# EAGLE board JM Logics I2C SMD Adapter v1.4 (EAGLE 6.5.0)
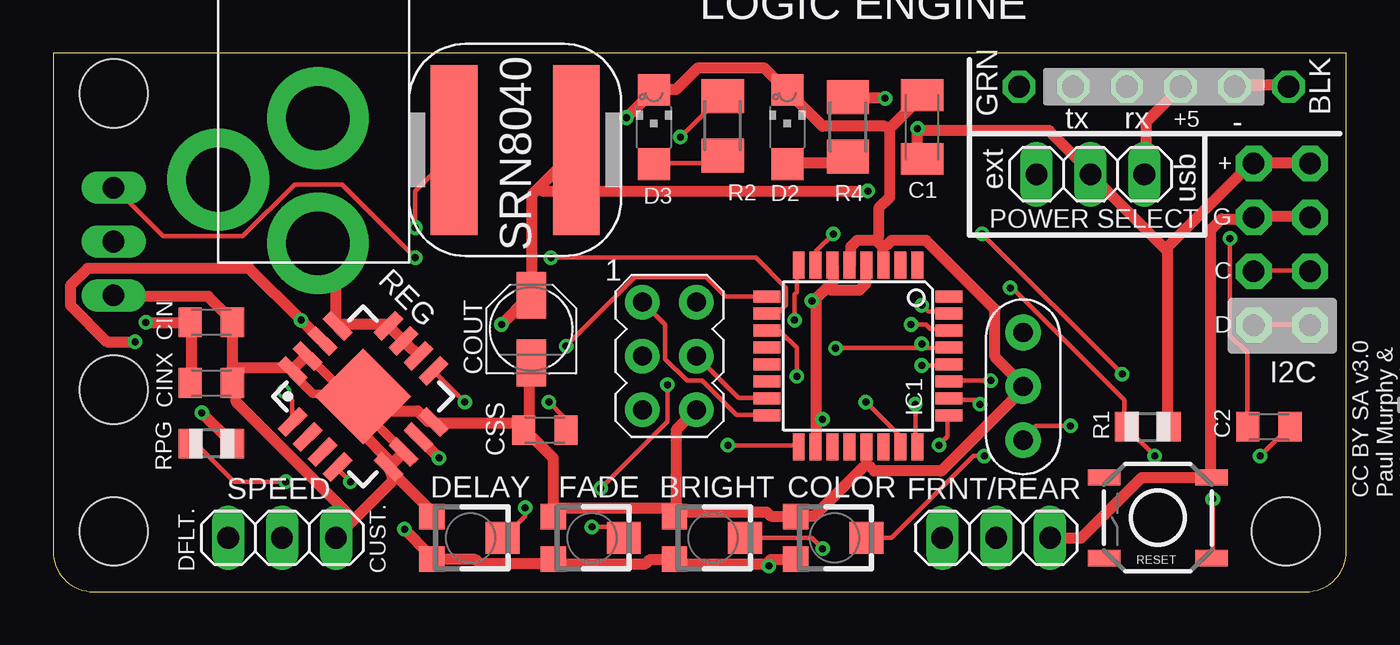
[diagram p0: board, top side]
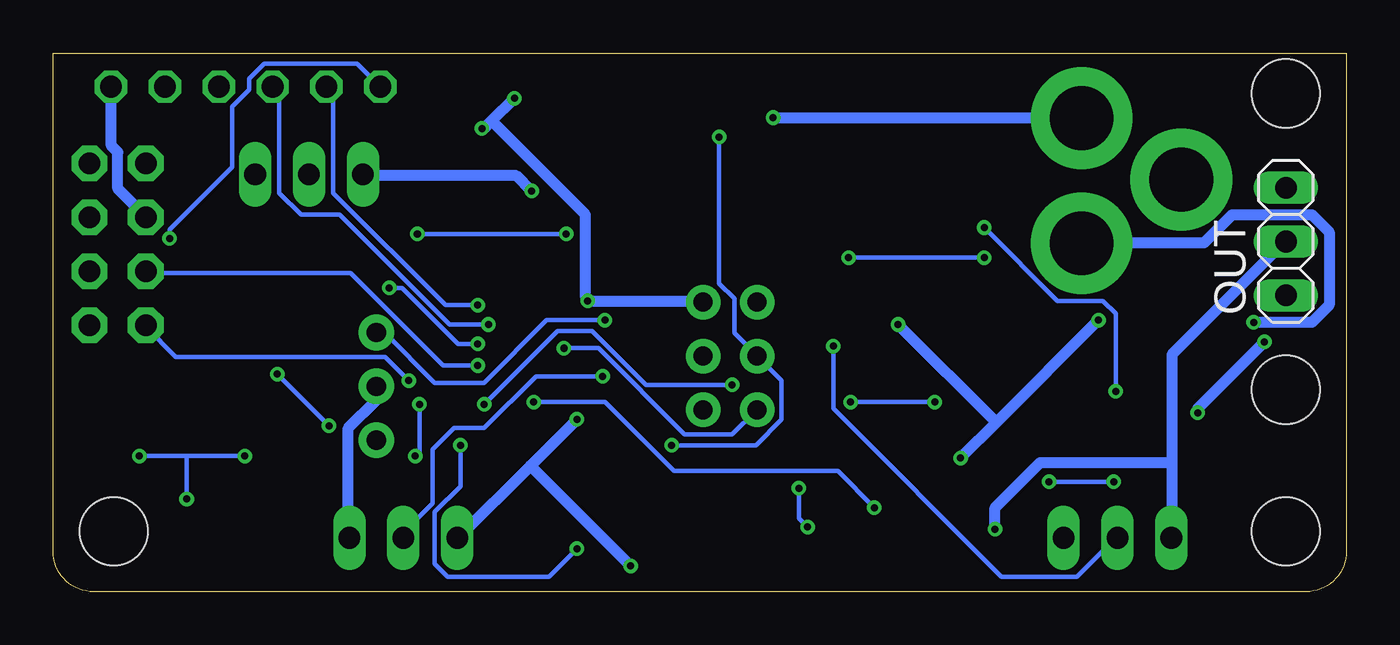
[diagram p1: board, bottom side, seen from below]

Size 60.96 x 25.4 mm. Coordinates in mm from the lower left corner, seen from the top.
Outline: 0,25.4 0,1.91 arc90 1.91,0 59.05,0 arc90 60.96,1.91 60.96,25.4 0,25.4
Copper layers (1*16): Top 0.0356mm / dielectric 1.5011mm / Bottom 0.0356mm
Design rules "LaenPCBOrder *": minimum track width 8mil, minimum drill 13mil, track to track 6mil, track to pad 6mil, pad to pad 6mil, via to via 12mil, smd to smd 6mil, copper to edge 15mil, drill to drill 6mil, minimum pad ring 7mil, minimum via ring 7mil, stop-mask expansion 4mil, vias tented up to drill 14mil, thermal gap 10mil
Net classes: 1 supply: width 0.508 mm, drill 0.152 mm, clearance 0.203 mm
Holes 3.2 mm at 58.1,2.86 2.86,2.86 2.86,30.16 2.86,9.53 2.86,23.5

## Footprints (pad centres in the part's own frame; a part is rotated, then mirrored left to right if it is on the bottom)
TC33X = smd 1.2 x 1.2: 1 -1,-1.825; 3 1,-1.825 | smd 1.5 x 1.6: 2 0,1.5
C1206K = smd 1.5 x 2: 1 -1.5,0; 2 1.5,0
C0805K = smd 1.1 x 1.4: 1 -1,0; 2 1,0
CASE_B = smd 2.2 x 1.4: + 1.6,0; - -1.6,0
CHIPLED_1206 = smd 1.5 x 1.5: A 0,-1.75; C 0,1.75
1X03 = drill 1.016 long: 1 -2.54,0; 2 0,0; 3 2.54,0
1X04-CB = drill 1.016 pad 1.676 octagon: 1 -3.81,0; 2 -1.27,0; 3 1.27,0; 4 3.81,0
TQFP32-08 = smd 1.27 x 0.559: 1 -4.293,2.8; 2 -4.293,2; 3 -4.293,1.2; 4 -4.293,0.4; 5 -4.293,-0.4; 6 -4.293,-1.2; 7 -4.293,-2; 8 -4.293,-2.8; 17 4.293,-2.8; 18 4.293,-2; 19 4.293,-1.2; 20 4.293,-0.4; 21 4.293,0.4; 22 4.293,1.2; 23 4.293,2; 24 4.293,2.8 | smd 0.559 x 1.27: 9 -2.8,-4.293; 10 -2,-4.293; 11 -1.2,-4.293; 12 -0.4,-4.293; 13 0.4,-4.293; 14 1.2,-4.293; 15 2,-4.293; 16 2.8,-4.293; 25 2.8,4.293; 26 2,4.293; 27 1.2,4.293; 28 0.4,4.293; 29 -0.4,4.293; 30 -1.2,4.293; 31 -2,4.293; 32 -2.8,4.293
AVRISP = drill 0.9 pad 1.626: 1 -1.27,2.54; 2 1.27,2.54; 3 -1.27,0; 4 1.27,0; 5 -1.27,-2.54; 6 1.27,-2.54
SRN8040 = smd 2.2 x 8: P$1 1.125,4; P$2 6.875,4
PJ-102A = drill 3 pad 4.8: RING 0.1,-3.39; RING_SW -4.6,-6.29; TIP 0.1,-9.29
1X06-CLEAN = drill 1.016 octagon: 1 -6.35,0; 2 -3.81,0; 3 -1.27,0; 4 1.27,0; 5 3.81,0; 6 6.35,0
R0805 = smd 1.1 x 1.4: 1 -1,0; 2 1,0
M1206 = smd 1.6 x 2: 1 -1.4,0; 2 1.4,0
TPS6213X = smd 1.45 x 0.55: 1 -3.2,1.5; 2 -3.2,0.5; 3 -3.2,-0.5; 4 -3.2,-1.5; 9 3.2,-1.5; 10 3.2,-0.5; 11 3.2,0.5; 12 3.2,1.5 | smd 0.55 x 1.45: 5 -1.5,-3.2; 6 -0.5,-3.2; 7 0.5,-3.2; 8 1.5,-3.2; 13 1.5,3.2; 14 0.5,3.2; 15 -0.5,3.2; 16 -1.5,3.2 | smd 3.2 x 3.2: 17-THERMALPAD 0,0
TACTILE_SWITCH_SMD = smd 1.524 x 0.762: 1 -2.54,1.905; 2 2.54,1.905; 3 -2.54,-1.905; 4 2.54,-1.905
CERM_OSC = drill 0.9 pad 1.676: P$1 -2.54,0; P$2 0,0; P$3 2.54,0

## Placement (x,y rotation side)
BRIGHT  [TC33X]  31.11,2.54 270 top
C1  0.1uF  [C1206K]  40.96,21.91 90 top
C2  0.1uF  [C0805K]  57.31,7.78 0 top
CIN  10uF  [C0805K]  7.46,12.7 0 top
CINX  100nF  [C0805K]  7.46,9.84 0 top
COLOR  [TC33X]  36.83,2.54 270 top
COUT  22uF  [CASE_B]  22.54,12.38 90 top
CSS  3.3nF  [C0805K]  23.18,7.62 180 top
D2  [CHIPLED_1206]  34.61,21.91 0 top
D3  Green  [CHIPLED_1206]  28.32,21.91 0 top
DELAY  [TC33X]  19.68,2.54 270 top
FADE  [TC33X]  25.4,2.54 270 top
FRNT/REAR  [1X03]  44.45,2.54 0 top
I2C  [1X04-CB]  56.59,16.38 90 top
I2C1  [1X04-CB]  59.25,16.38 90 top
IC1  MEGA328P  [TQFP32-08]  37.94,11.11 270 top
ICSP  AVRISP-6  [AVRISP]  29.05,11.11 0 top
INDUCTOR  SRN8040-2R2Y  [SRN8040]  17.78,16.83 0 top
J2  2.1MMJACK  [PJ-102A]  12.38,25.72 0 top
JP7  [1X06-CLEAN]  51.88,23.81 180 top
OUT  [1X03]  2.86,16.51 270 bottom
PWR_SEL1  [1X03]  48.9,19.68 0 top
R1  10k  [R0805]  51.59,7.78 0 top
R3  1.0 K  [M1206]  31.56,21.97 270 top
R4  1.0 K  [M1206]  37.47,21.91 270 top
REG  TPS62133  [TPS6213X]  14.61,9.21 45 top
RESET  [TACTILE_SWITCH_SMD]  52.07,3.49 180 top
RPG  100k  [R0805]  7.46,6.99 180 top
SPEED  [1X03]  10.79,2.54 0 top
U$1  ROYAL-ENGINEERS-OF-NABOOSMALL  [ROYAL-ENGINEERS-OF-NABOO-SMALL]  73.5,15.24 0 bottom  (outside the outline)
U$2  RSERIES-OSHW-LOGOMEDIUM  [RSERIES-OSHW-LOGO-MEDIUM]  65.79,8.86 0 top  (outside the outline)
X1  16MHz  [CERM_OSC]  45.72,9.68 90 top

## Library data of the parts
BRIGHT C2 CIN CINX COLOR CSS DELAY FADE ICSP R1 RPG = adafruit
C1 D2 D3 J2 R3 R4 = minimidi
COUT = dp_devices
FRNT/REAR OUT PWR_SEL1 SPEED = pinhead
I2C I2C1 JP7 = carduino
IC1 = avr-7
INDUCTOR REG = joymonkey
RESET = SparkFun-Electromechanical
U$1 U$2 = rseries
X1 = digg

## Nets
+5V [supply]: BRIGHT.3 C1.1 COLOR.3 DELAY.3 FADE.3 FRNT/REAR.1 I2C1.4 I2C.4 IC1.4 IC1.6 IC1.18 ICSP.2 OUT.2 PWR_SEL1.2 R1.2 R4.1 SPEED.1
ANALOG0: DELAY.2 IC1.23
ANALOG1: FADE.2 IC1.24
ANALOG2: BRIGHT.2 IC1.25
ANALOG3: COLOR.2 IC1.26
ANALOG4: I2C1.1 I2C.1 IC1.27
ANALOG5: I2C1.2 I2C.2 IC1.28
AREF: IC1.20
DIGITAL2: IC1.32
DIGITAL3: IC1.1
DIGITAL4: IC1.2
DIGITAL5: IC1.9 SPEED.2
DIGITAL6: IC1.10 OUT.1
DIGITAL7: FRNT/REAR.2 IC1.11
DIGITAL8: IC1.12
DIGITAL9: IC1.13
DIGITAL10: IC1.14
GND [supply]: BRIGHT.1 C1.2 CIN.2 CINX.2 COLOR.1 COUT.- CSS.2 D2.C D3.C DELAY.1 FADE.1 FRNT/REAR.3 I2C1.3 I2C.3 IC1.3 IC1.5 IC1.21 ICSP.6 J2.RING JP7.1 JP7.2 OUT.3 REG.5 REG.6 REG.8 REG.15 REG.16 REG.17-THERMALPAD RESET.3 SPEED.3 X1.P$2
MISO: IC1.16 ICSP.1
MOSI: IC1.15 ICSP.4
N$1: IC1.7 X1.P$1
N$2: IC1.8 X1.P$3
N$3: INDUCTOR.P$1 REG.1
N$4: D3.A R3.2
N$5 [supply]: D2.A R4.2
N$6 [supply]: CIN.1 CINX.1 J2.TIP REG.10 REG.11 REG.12 REG.13
N$7: CSS.1 REG.9
N$8: REG.4 RPG.2
N$9 [supply]: COUT.+ INDUCTOR.P$2 PWR_SEL1.1 REG.7 REG.14 RPG.1
RST: C2.2 IC1.29 ICSP.5 R1.1 RESET.1
RTS#: C2.1 JP7.6
RXD: IC1.30 JP7.4
SCK: IC1.17 ICSP.3 R3.1
TXD: IC1.31 JP7.5
USB_5V [supply]: JP7.3 PWR_SEL1.3

## Tracks (layer width: path | path; a pad name or v marks a point on that pad's centre or on a via)
+5V  (via drill 0.33)
  Top 0.508: I2C1.4 59.23,20.22 56.59,20.22 I2C.4 56.39,20.12 52.53,16.26 52.53,16.05 | v39.22,23.27 37.49,23.27 R4.1 | C1.1 40.95,20.42 40.74,20.62 v40.74,21.84 40.95,21.74 46.94,21.74 48.77,19.91 PWR_SEL1.2 52.53,16.05 | 52.53,16.05 52.53,7.82 R1.2 | 33.63,1.32 33.83,1.52 34.95,1.52 COLOR.3 | 33.63,1.32 29.36,1.32 BRIGHT.3 29.26,1.52 28.14,1.52 27.94,1.32 23.67,1.32 FADE.3 23.57,1.52 23.37,1.32 20.12,1.32 19.91,1.52 17.88,1.52 DELAY.3 17.78,1.73 v16.56,2.95 | 35.97,13.72 35.97,13.82 36.52,14.38 | 35.97,13.72 35.97,8.13 | 35.97,8.13 35.97,6.91 IC1.18 | 36.52,14.38 36.78,14.63 36.78,15.34 IC1.6 | IC1.4 38.3,15.34 38.3,14.53 38,14.22 36.68,14.22 36.52,14.38 | v36.27,8.13 35.97,8.13 | v35.76,13.72 35.97,13.72 | v33.73,1.22 33.63,1.32
  Bottom 0.508: 40.28,22.2 40.64,21.84 v40.74,21.84 | 40.28,22.2 v39.22,23.27 | 8.23,6.1 8.23,11.18 2.95,16.46 OUT.2 | 8.23,6.1 8.23,2.54 SPEED.1 | v36.27,8.13 38.46,5.94 | 38.46,5.94 41.86,2.54 FRNT/REAR.1 | ICSP.2 30.38,13.72 v35.76,13.72 35.87,13.92 35.87,17.78 40.28,22.2 | 38.46,5.94 v33.73,1.22 | 8.23,6.1 14.43,6.1 16.56,3.96 v16.56,2.95
ANALOG0  (via drill 0.33)
  Top 0.203: v38.3,8.94 39.93,7.32 39.93,6.91 IC1.23 | v22.25,3.96 22.25,3.56 21.23,2.54 DELAY.2
  Bottom 0.203: v38.3,8.94 34.95,8.94 31.7,5.69 23.98,5.69 v22.25,3.96
ANALOG1  (via drill 0.33)
  Top 0.203: v40.64,8.84 40.64,6.91 IC1.24 | v28.96,9.75 28.96,8.03 v25.81,4.88 | v25.4,3.05 26.31,3.05 26.82,2.54 FADE.2
  Bottom 0.203: v40.64,8.84 37.19,12.29 35.56,12.29 33.02,9.75 v28.96,9.75 | v25.81,4.88 25.81,3.45 v25.4,3.05
ANALOG2  (via drill 0.33)
  Top 0.203: v41.76,6.91 42.16,7.32 42.16,8.23 IC1.25 | v36.27,2.03 35.76,2.54 BRIGHT.2
  Bottom 0.203: v41.76,6.91 41.76,4.98 42.98,3.76 42.98,1.32 42.37,0.71 37.59,0.71 v36.27,2.03
ANALOG3  (via drill 0.33)
  Top 0.203: v43.69,8.84 43.48,9.04 42.27,9.04 IC1.26 | v43.89,6.4 43.38,6.4 39.52,2.54 COLOR.2
  Bottom 0.203: v43.69,8.84 43.69,6.6 v43.89,6.4
ANALOG4  (via drill 0.33)
  Top 0.203: v44.2,9.96 42.27,9.96 IC1.27 | I2C1.1 59.23,12.6 56.59,12.6 I2C.1
  Bottom 0.203: v44.2,9.96 45.31,11.07 55.17,11.07 56.59,12.5 I2C.1
ANALOG5  (via drill 0.33)
  Top 0.203: v40.95,10.67 42.16,10.67 IC1.28 | I2C1.2 59.23,15.14 56.59,15.14 I2C.2
  Bottom 0.203: v40.95,10.67 42.57,10.67 46.94,15.04 56.59,15.04 I2C.2
DIGITAL5  (via drill 0.33)
  Top 0.203: v24.18,11.58 27.43,14.83 30.79,14.83 31.7,13.92 33.63,13.92 IC1.9
  Bottom 0.203: v24.18,11.58 24.18,8.64 16.26,0.71 12.7,0.71 10.87,2.54 SPEED.2
DIGITAL6  (via drill 0.33)
  Top 0.203: v23.47,15.75 33.12,15.75 34.54,14.33 34.54,13.51 34.24,13.21 33.73,13.21 IC1.10 | v17.07,15.75 13.61,19.2 11.38,19.2 8.94,16.76 5.18,16.76 2.95,19 OUT.1
  Bottom 0.203: v17.07,15.75 v23.47,15.75
DIGITAL7  (via drill 0.33)
  Top 0.203: v35.05,10.16 35.05,11.48 34.24,12.29 33.73,12.29 IC1.11
  Bottom 0.203: v35.05,10.16 38.2,10.16 40.64,7.72 42.06,7.72 43.08,6.71 43.08,4.17 44.4,2.85 44.4,2.54 FRNT/REAR.2
GND  (via drill 0.33)
  Top 0.508: REG.15 11.89,11.07 11.28,10.46 REG.16 11.07,10.57 8.43,10.57 | 8.43,10.57 8.43,12.7 CIN.2 8.33,12.9 7.32,13.92 2.95,13.92 OUT.3 | 8.43,10.57 8.43,9.86 CINX.2 8.64,9.65 8.64,8.94 14.02,3.56 SPEED.3 13.31,2.54 16.05,5.28 REG.5 | 38.3,5.99 35.87,3.56 35.05,3.56 COLOR.1 34.75,3.56 33.83,3.56 33.63,3.76 29.57,3.76 BRIGHT.1 | 38.3,5.99 38.3,6.81 IC1.21 | BRIGHT.1 29.36,3.56 29.36,7.62 30.28,8.53 ICSP.6 30.38,8.64 | CSS.2 22.25,7.62 23.57,6.3 23.57,3.56 FADE.1 23.77,3.96 29.16,3.96 BRIGHT.1 | CSS.2 21.95,7.72 21.74,7.92 17.98,7.92 REG.8 17.68,8.03 17.17,8.53 14.83,8.53 REG.17-THERMALPAD 14.63,9.14 14.63,7.42 15.85,6.2 REG.5 | COUT.- 22.45,10.77 22.45,7.72 CSS.2 | DELAY.1 17.78,3.56 17.78,3.86 15.85,5.79 REG.5 | REG.6 16.46,6.5 15.95,5.99 REG.5 | 37.59,15.44 IC1.5 37.59,15.65 37.59,16.26 37.9,16.56 38.81,16.56 | 39.12,16.26 38.81,16.56 | 39.12,16.26 39.12,15.44 IC1.3 | 39.42,21.84 39.42,18.59 38.91,18.09 38.91,16.76 38.81,16.56 | 39.42,21.84 40.95,23.37 C1.2 | 39.42,21.84 39.22,21.95 36.27,21.95 34.75,23.47 D2.C 34.54,23.67 33.53,24.69 30.38,24.69 29.36,23.67 28.35,23.67 D3.C 28.14,23.47 v27.03,22.35 | JP7.2 55.78,23.88 58.22,23.88 JP7.1 | I2C1.3 59.23,17.68 56.59,17.68 I2C.3 56.39,17.58 55.07,17.58 54.56,17.07 54.56,5.59 RESET.3 54.56,5.38 51.31,5.38 48.46,2.54 FRNT/REAR.3 | 39.12,16.26 39.32,16.36 39.52,16.56 41.15,16.56 44.4,13.31 44.4,11.07 45.72,9.75 X1.P$2 45.62,9.45 41.86,5.69 38.71,5.69 38.51,5.89 38.3,5.99
  Bottom 0.508: JP7.1 58.22,23.77 58.22,21.03 57.91,20.73 57.91,19 56.59,17.68 I2C.3 | X1.P$2 45.72,9.04 47.04,7.72 47.04,2.54 FRNT/REAR.3 | v27.03,22.35 12.5,22.35 J2.RING
MISO
  Top 0.203: IC1.16 33.63,8.33 32.21,8.33 30.58,9.96 29.87,9.96 28.85,10.97 28.85,12.6 27.84,13.61 ICSP.1
MOSI
  Top 0.203: IC1.15 33.63,9.14 32.31,9.14 30.38,11.07 ICSP.4
N$1  (via drill 0.33)
  Top 0.203: v36.78,16.87 35.97,16.05 35.97,15.44 IC1.7 | v50.39,10.26 v43.79,16.87 | v47.95,7.82 46.33,7.82 45.72,7.21 X1.P$1
  Bottom 0.203: v43.79,16.87 v36.78,16.87 | v47.95,7.82 v50.39,10.26
N$2  (via drill 0.33)
  Top 0.203: v34.95,12.8 34.95,14.02 35.05,14.12 35.05,15.34 IC1.8
  Bottom 0.203: v34.95,12.8 37.69,12.8 40.64,9.86 42.98,9.86 45.31,12.19 45.72,12.19 X1.P$3
N$3  (via drill 0.33)
  Top 0.203: v10.87,9.45 11.28,9.04 11.28,8.03 REG.1 | v17.07,17.17 17.07,18.9 18.9,20.73 INDUCTOR.P$1
  Bottom 0.203: v10.87,9.45 10.87,13.11 11.48,13.72 13.61,13.72 v17.07,17.17
N$4
  Top 0.203: D3.A 28.35,20.22 31.19,20.22 31.5,20.52 R3.2
N$5
  Top 0.508: D2.A 34.65,20.22 37.19,20.22 37.39,20.42 R4.2
N$6  (via drill 0.33)
  Top 0.508: REG.10 17.17,11.18 16.66,11.68 REG.11 16.46,11.89 15.95,12.39 REG.12 15.75,12.6 13.41,12.6 REG.13 13.31,12.8 13.31,15.54 12.5,16.36 J2.TIP | CINX.1 6.5,9.86 6.5,12.7 CIN.1 v4.37,12.7
  Bottom 0.508: v4.37,12.7 1.63,12.7 0.81,13.51 0.81,16.97 1.63,17.78 5.38,17.78 6.71,16.46 12.39,16.46 J2.TIP
N$7  (via drill 0.33)
  Top 0.203: v23.37,8.94 24.08,8.23 24.08,7.62 CSS.1 | v19.41,8.94 17.98,10.36 REG.9
  Bottom 0.203: v19.41,8.94 v23.37,8.94
N$8  (via drill 0.33)
  Top 0.203: v10.97,5.18 8.53,5.18 6.81,6.91 6.5,6.91 RPG.2 | v14.02,5.18 13.41,5.79 REG.4
  Bottom 0.203: v14.02,5.18 v10.97,5.18
N$9  (via drill 0.33)
  Top 0.508: v7.01,8.43 8.43,7.01 RPG.1 | v3.86,11.79 2.54,11.79 0.81,13.51 0.81,14.43 1.63,15.24 9.25,15.24 v11.68,12.8 12.6,11.89 REG.14 | v18.19,6.3 17.27,7.21 REG.7 | 22.91,19.05 24.59,20.73 INDUCTOR.P$2 | 22.91,19.05 22.55,18.69 22.55,14.02 COUT.+ 22.35,13.82 v21.13,12.6 | v38.41,18.9 23.06,18.9 22.91,19.05
  Bottom 0.508: v7.01,8.43 7.01,8.64 v3.86,11.79 | v11.68,12.8 16.51,7.98 | 16.51,7.98 v18.19,6.3 | v38.41,18.9 39.12,19.61 46.33,19.61 PWR_SEL1.1 | v21.13,12.6 16.51,7.98
RST  (via drill 0.33)
  Top 0.203: v51.92,6.4 50.6,7.72 R1.1 50.49,7.82 50.49,9.04 45.21,14.33 v45.11,14.33 | v56.9,6.4 58.22,7.72 C2.2 | v54.66,4.37 54.66,1.63 RESET.1 | v36.88,11.48 40.95,11.48 | 40.95,11.48 42.16,11.48 IC1.29 | 40.95,11.48 v40.95,11.68
  Bottom 0.203: v56.9,6.4 54.66,6.4 | 54.66,6.4 v51.92,6.4 | 54.66,6.4 v54.66,4.37 | v36.88,11.48 35.26,11.48 31.19,7.42 28.96,7.42 27.84,8.53 ICSP.5 | v45.11,14.33 44.5,14.33 41.86,11.68 v40.95,11.68
RTS#  (via drill 0.33)
  Top 0.203: v55.47,16.66 55.47,12.09 56.29,11.28 56.29,7.82 C2.1
  Bottom 0.203: v55.47,16.66 55.47,17.07 52.53,20.02 52.53,22.86 51.71,23.67 51.71,24.18 51,24.89 46.63,24.89 45.62,23.88 JP7.6
RXD  (via drill 0.33)
  Top 0.203: v40.44,12.6 41.15,12.6 41.35,12.39 42.16,12.39 IC1.30
  Bottom 0.203: v40.44,12.6 42.27,12.6 47.45,17.78 49.28,17.78 50.29,18.8 50.29,23.47 50.6,23.77 JP7.4
SCK  (via drill 0.33)
  Top 0.203: v31.8,6.91 35.05,6.91 IC1.17 | v29.57,21.44 31.5,23.37 R3.1
  Bottom 0.203: v31.8,6.91 27.84,6.91 26.62,8.13 26.62,9.96 27.74,11.07 ICSP.3 27.84,11.18 28.85,12.19 28.85,13.82 29.57,14.53 v29.57,21.44
TXD  (via drill 0.33)
  Top 0.203: v40.95,13.51 41.25,13.21 42.16,13.21 IC1.31
  Bottom 0.203: v40.95,13.51 42.47,13.51 47.75,18.8 47.75,23.47 48.06,23.77 JP7.5
USB_5V
  Top 0.508: PWR_SEL1.3 51.51,19.71 51.51,22.15 53.14,23.77 JP7.3

## Text on the board
Bottom: v1.4
tPlace: LOGIC ENGINE | tx | rx | +5 | - | GRN | BLK | ext | D3 | R2 | usb | POWER SELECT | CUST. | DFLT.
_tsilk: + | G | C | D | CC BY SA v3.0 / Paul Murphy & / Michael Erwin